# Altium PCB Final.PcbDoc
Units mil, origin at the board's own origin, x right, y up, seen from the top; angles counter-clockwise.
Board outline 2825 x 3675 mil, 4 copper layers (Top Layer, Int1 (GND), Int2 (PWR), Bottom Layer), stack 43.712 mil thick; 64 components, 44 nets, 192 pads, 1 vias.
Unrouted connection lines stored in the file: 20.
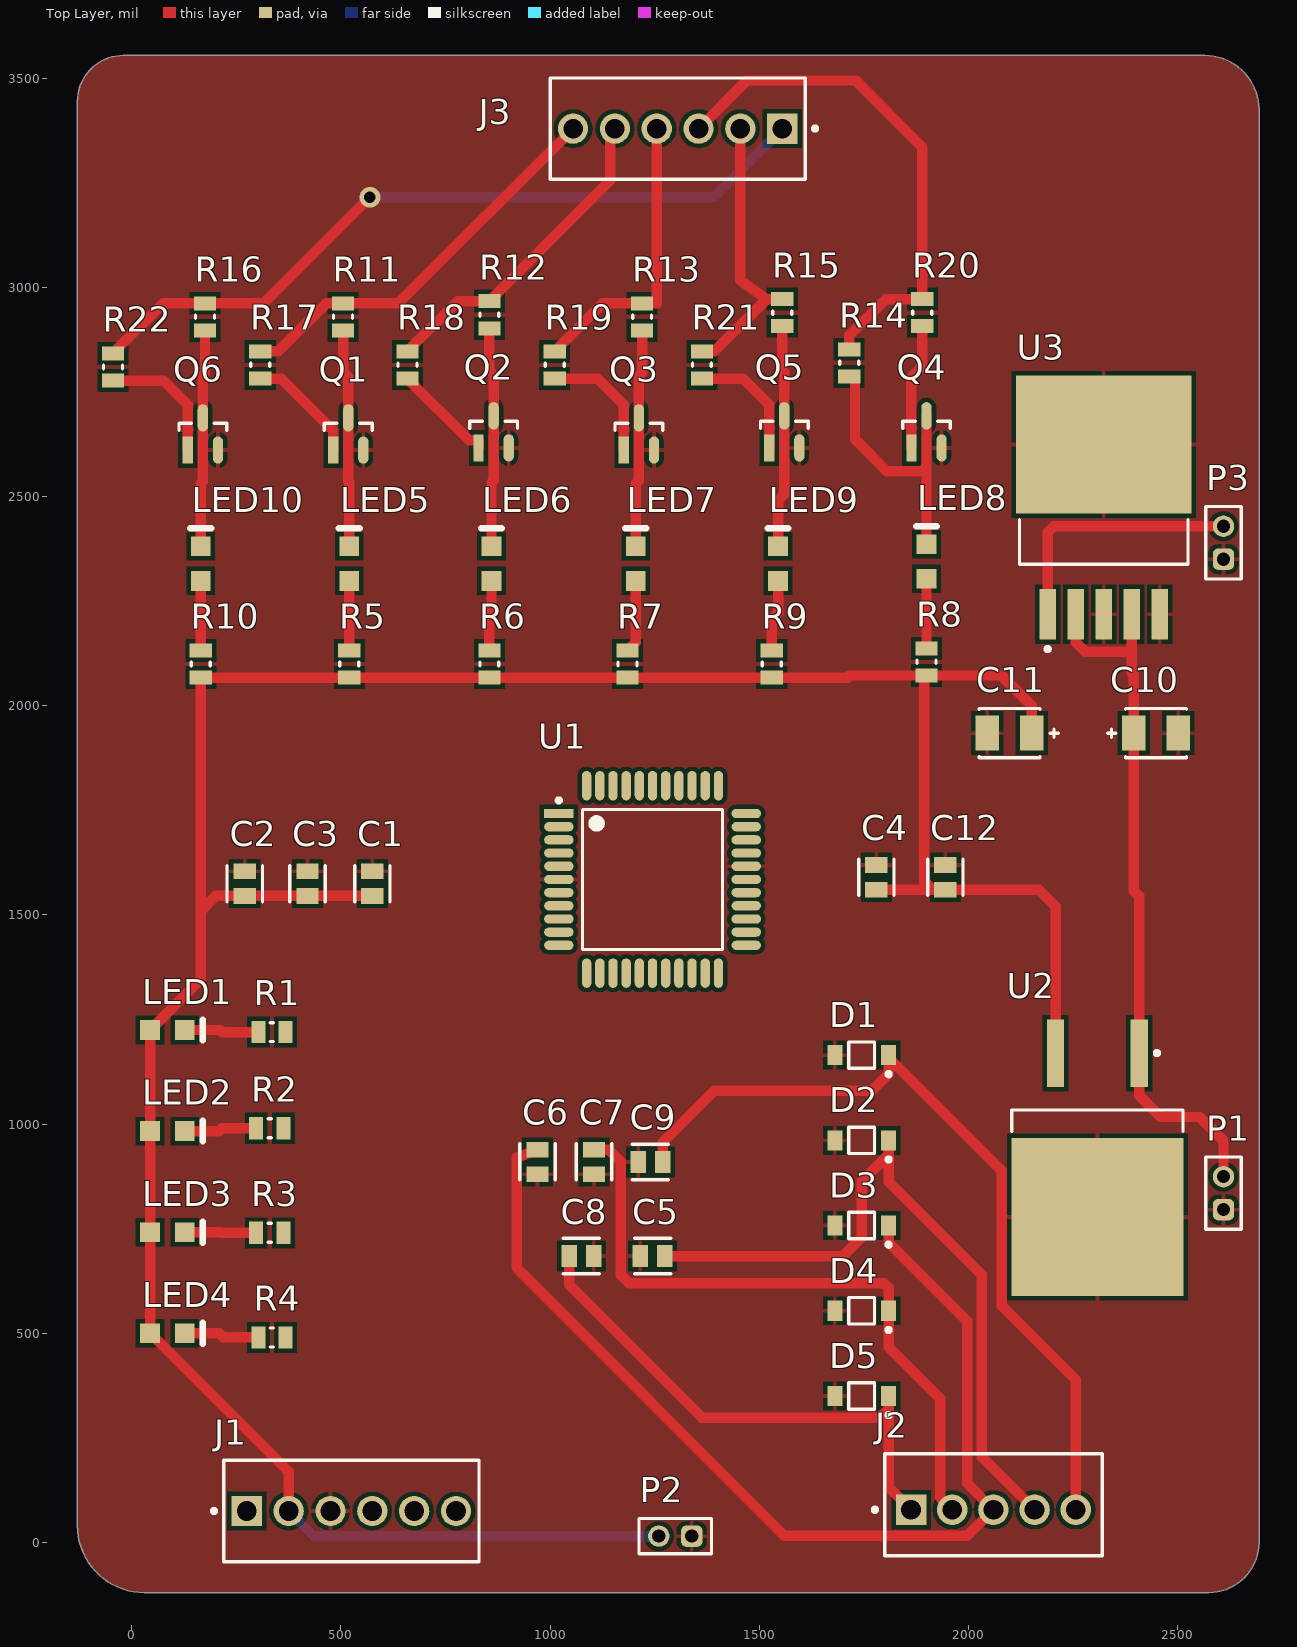
[diagram p0: Top Layer view]
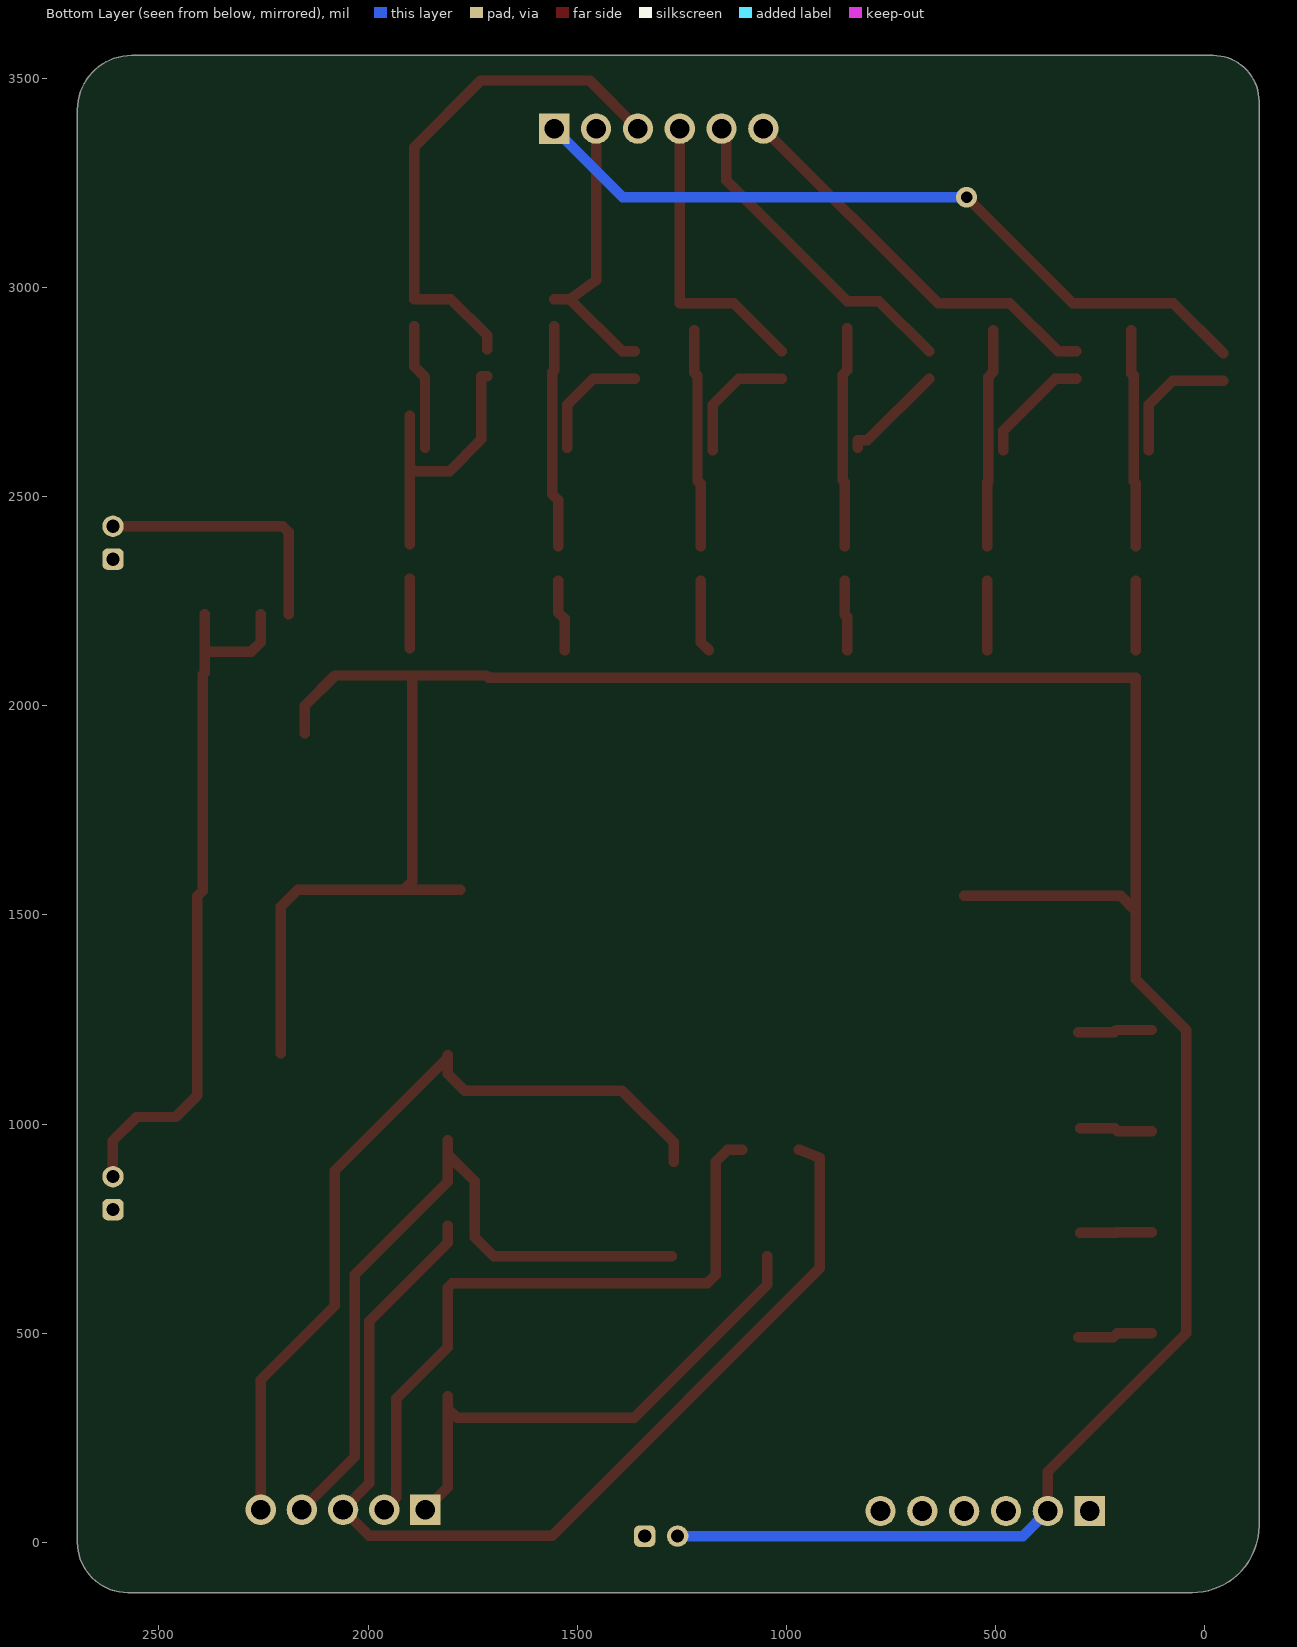
[diagram p1: Bottom Layer view, seen from below]
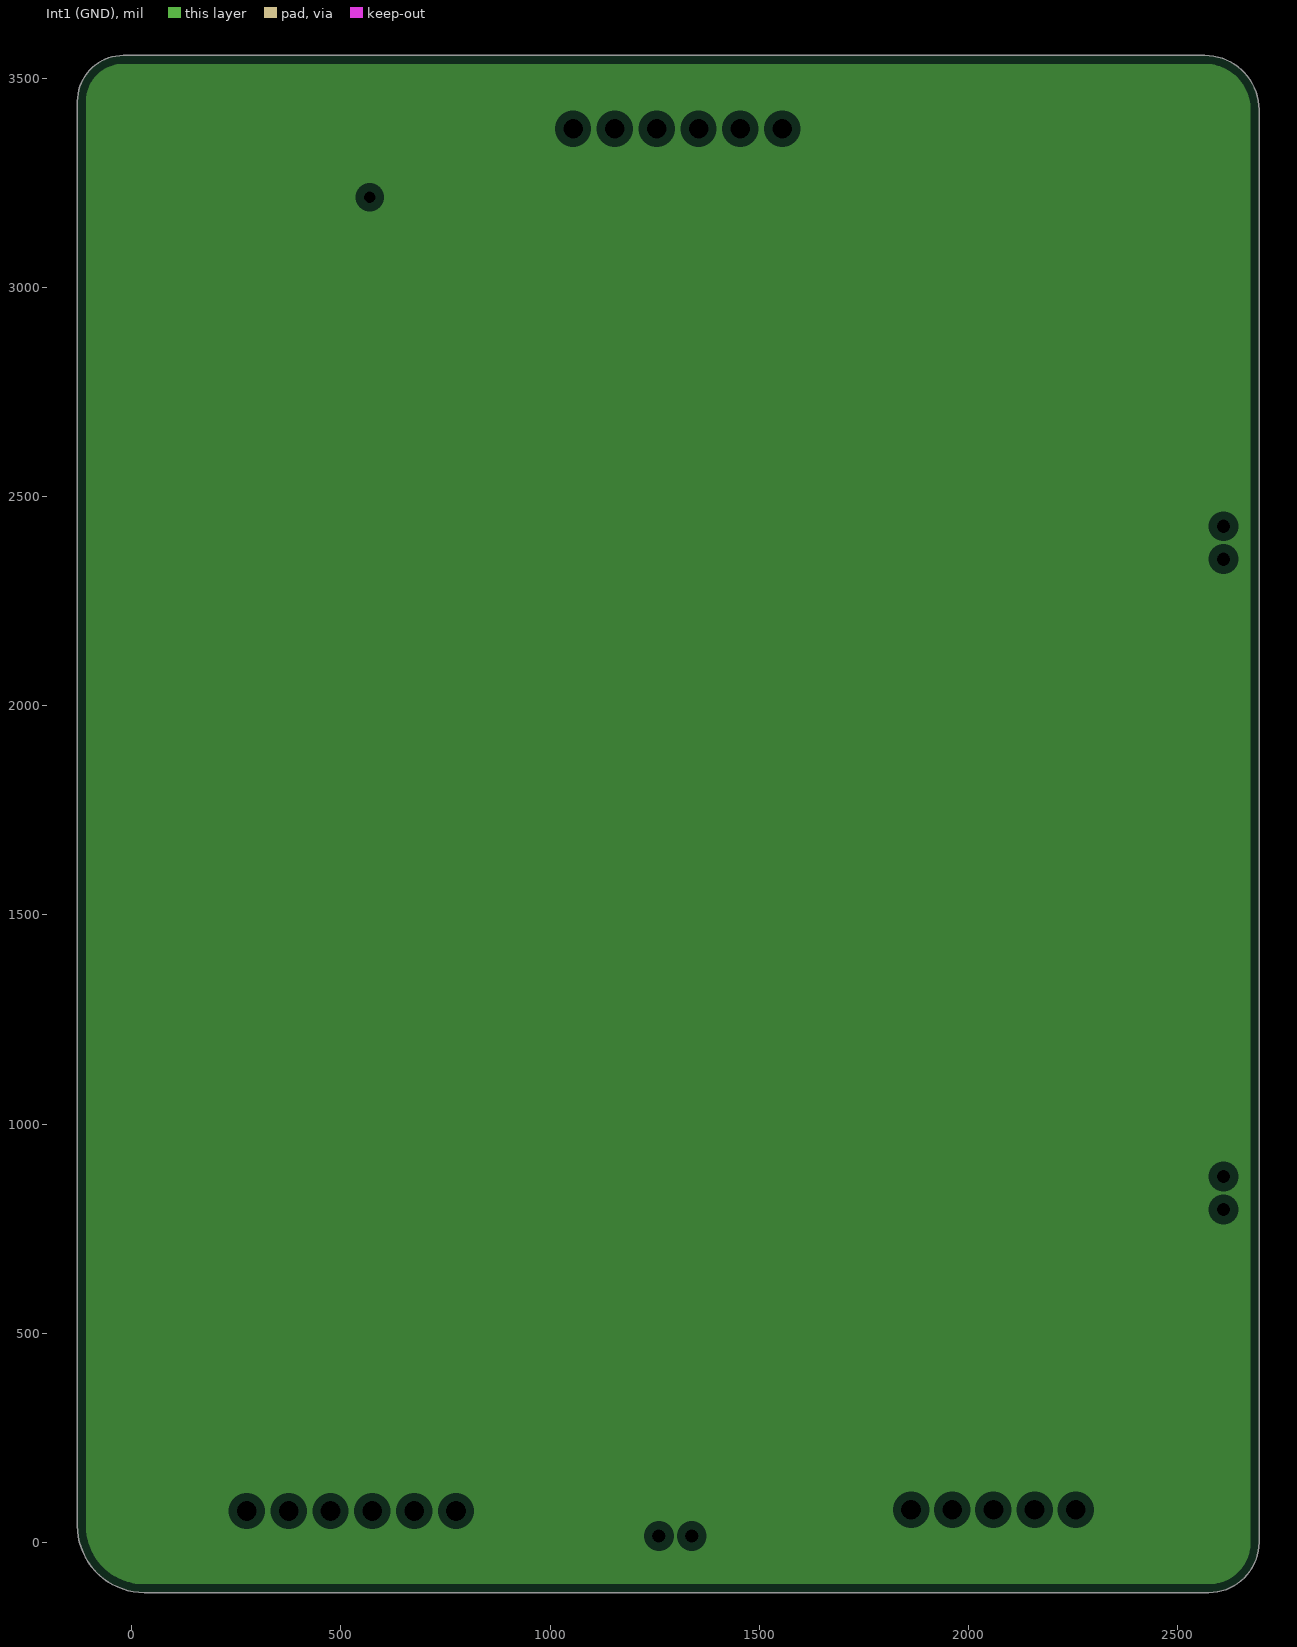
[diagram p2: Int1 (GND), clearances drawn from the general rule]
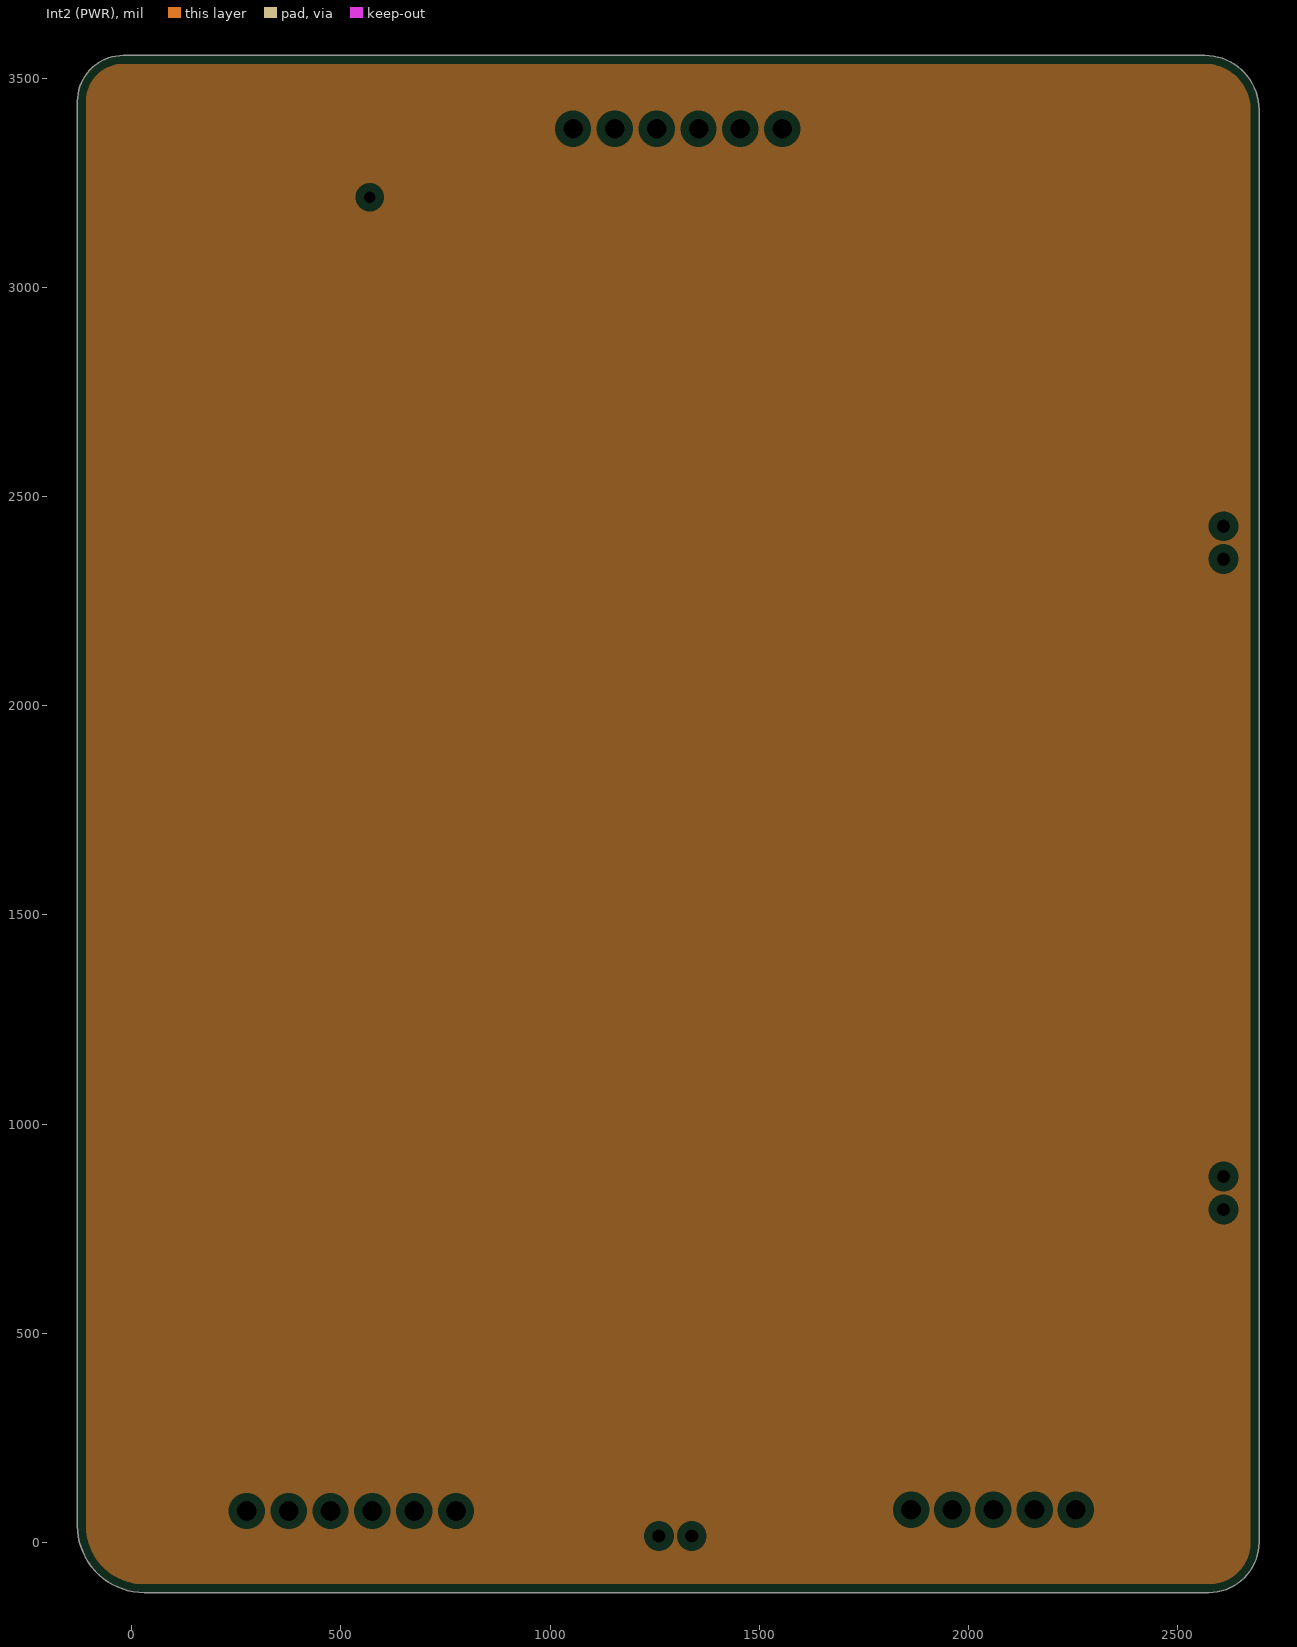
[diagram p3: Int2 (PWR), clearances drawn from the general rule]

## Layer stack, top to bottom
Top Solder: solder mask 1, SM-001, Dk 4
Top Layer: signal copper 1.378
Dielectric 1: prepreg 5.1, PP-017, Dk 4.3
Int1 (GND): plane copper 1.378, net GND
Dielectric 3: core 28, Core-039, Dk 4.8
Int2 (PWR): plane copper 1.378
Dielectric 5: prepreg 5.1, PP-017, Dk 4.3
Bottom Layer: signal copper 1.378
Bottom Solder: solder mask 1, SM-001, Dk 4

## Board outline
30,-120 2575,-120 ccw(c2575,0) 2695,0 2695,3425 ccw(c2565,3425) 2565,3555 -20,3555 ccw(c-20,3445) -130,3445 -130,40 ccw(c30,40)

## Design rules (kind name [scope] priority, off if disabled: settings)
Clearance [All] p1: gap=10 ignorepadtopadclearanceinfootprint=FALSE except(0: Arc-Hole Track-Hole SMDPad-Hole THPad-Hole Via-Hole Fill-Hole Poly-Hole Region-Hole Text-Hole)
PlaneClearance [All] p1: clearance=20
PlaneConnect [All] p1: planeconnectstyle=Relief reliefexpansion=20 reliefentries=4 reliefconductorwidth=10 reliefairgap=10
PolygonConnect [All] p1: connectstyle=Relief reliefconductorwidth=10 reliefentries=4 polygonreliefangle="90 Angle" airgapwidth=10
RoutingVias [All] p1: holewidth=28 width=50 viastyle="Through Hole" minholewidth=28 minwidth=50 maxholewidth=28 maxwidth=50
SolderMaskExpansion [All] p1: expansion=4 istentingtop=FALSE
Width [All] p1: maxlimit=50 minlimit=10 preferedwidth=25 minimp=50.000000 maximp=50.000000 favimp=50.000000
28 further rules are at their usual default settings.

## Components (designator, comment, footprint, x,y, rotation, side; value= is the part's Value field where it differs from the comment)
C1 "10n" FP-C0805C-DN-MFG 575,1575 r90 top value="0.22 μF"
C2 "10n" FP-C0805C-DN-MFG 270,1575 r90 top value="0.22 μF"
C3 "10n" FP-C0805C-DN-MFG 420,1575 r90 top value="0.22 μF"
C4 "10n" FP-C0805C-DN-MFG 1780,1590 r90 top value="0.22 μF"
C5 "100n" FP-C0805C-DN-MFG 1245,684.53 r180 top value="0.22 μF"
C6 "100n" FP-C0805C-DN-MFG 970,909.53 r270 top value="0.22 μF"
C7 "100n" FP-C0805C-DN-MFG 1105,909.53 r270 top value="0.22 μF"
C8 "10n" FP-C0805C-DN-MFG 1075,684.53 r0 top value="0.22 μF"
C9 "100n" FP-C0805C-DN-MFG 1240,909.53 r180 top value="0.22 μF"
C10 "220u / 63V" FP-T491B107K006AT-MFG 2448.59,1934.7 r180 top
C11 "10u / 63V" FP-T491B107K006AT-MFG 2098.59,1934.7 r0 top
C12 "10n" FP-C0805C-DN-MFG 1945,1590 r90 top value="0.22 μF"
D1 "5V1 / 1W" ONSC-SOD-123-2-425-04_V 1745,1165 r180 top
D2 "5V1 / 1W" ONSC-SOD-123-2-425-04_V 1745,961.25 r180 top
D3 "5V1 / 1W" ONSC-SOD-123-2-425-04_V 1745,757.5 r180 top
D4 "5V1 / 1W" ONSC-SOD-123-2-425-04_V 1745,553.75 r180 top
D5 "5V1 / 1W" ONSC-SOD-123-2-425-04_V 1745,350 r180 top
J1 "22-27-2061" FP-22-27-2061-MFG 525,75 r0 top
J2 "22-04-1051" FP-22-04-1051-MFG 2060,90 r180 top
J3 "22-27-2061" FP-22-27-2061-MFG 1305,3380 r180 top
LED1 "" AVAG-HSMX-C170_V 85,1225 r0 top
LED2 "" AVAG-HSMX-C170_V 85,983.33 r0 top
LED3 "" AVAG-HSMX-C170_V 85,741.67 r0 top
LED4 "" AVAG-HSMX-C170_V 85,500 r0 top
LED5 "" AVAG-HSMX-C170_V 520,2340 r90 top
LED6 "" AVAG-HSMX-C170_V 860,2340 r90 top
LED7 "" AVAG-HSMX-C170_V 1205,2340 r90 top
LED8 "" AVAG-HSMX-C170_V 1900,2345 r90 top
LED9 "" AVAG-HSMX-C170_V 1545,2340 r90 top
LED10 "" AVAG-HSMX-C170_V 165,2340 r90 top
P1 "62000211121" 62000211121 2610,835 r90 top
P2 "62000211121" 62000211121 1299.37,15 r180 top
P3 "62000211121" 62000211121 2610,2390 r90 top
Q1 "BS170FTA" FP-SOT23-IPC_A 517.5,2650 r90 top
Q2 "BS170FTA" FP-SOT23-IPC_A 865,2655 r90 top
Q3 "BS170FTA" FP-SOT23-IPC_A 1212.5,2650 r90 top
Q4 "BS170FTA" FP-SOT23-IPC_A 1900,2655 r90 top
Q5 "BS170FTA" FP-SOT23-IPC_A 1560,2655 r90 top
Q6 "BS170FTA" FP-SOT23-IPC_A 170,2650 r90 top
R1 "560E" RESC2013X50X30LL20T20 335,1220 r180 top
R2 "560E" RESC2013X50X30LL20T20 330,990 r180 top
R3 "560E" RESC2013X50X30LL20T20 330,740 r180 top
R4 "560E" RESC2013X50X30LL20T20 335,490 r180 top
R5 "560E" RESC2013X50X30LL20T20 520,2100 r270 top
R6 "560E" RESC2013X50X30LL20T20 855,2100 r270 top
R7 "560E" RESC2013X50X30LL20T20 1185,2100 r270 top
R8 "560E" RESC2013X50X30LL20T20 1900,2105 r270 top
R9 "560E" RESC2013X50X30LL20T20 1530,2100 r270 top
R10 "560E" RESC2013X50X30LL20T20 165,2100 r270 top
R11 "560E" RESC2013X50X30LL20T20 505,2930 r90 top
R12 "560E" RESC2013X50X30LL20T20 855,2935 r90 top
R13 "560E" RESC2013X50X30LL20T20 1220,2930 r90 top
R14 "560E" RESC2013X50X30LL20T20 1715,2820 r90 top
R15 "560E" RESC2013X50X30LL20T20 1555,2940 r90 top
R16 "560E" RESC2013X50X30LL20T20 175,2930 r90 top
R17 "560E" RESC2013X50X30LL20T20 307,2815 r90 top
R18 "560E" RESC2013X50X30LL20T20 659,2815 r90 top
R19 "560E" RESC2013X50X30LL20T20 1011,2815 r90 top
R20 "560E" RESC2013X50X30LL20T20 1890,2940 r90 top
R21 "560E" RESC2013X50X30LL20T20 1363,2815 r90 top
R22 "560E" RESC2013X50X30LL20T20 -45,2810 r90 top
U1 "PIC16F1787-I/PT" FP-C04-076-IPC_A 1245,1585 r0 top
U2 "L7805CD2T-TR" TO-263_M 2308.59,919.7 r270 top
U3 "LM2576D2T-005G" FP-936A-02-MFG 2323.59,2474.3 r0 top

## Footprints (in the part's own frame and the unit in brackets; to place one, negate y for a bottom-side part, rotate by r counter-clockwise, add the part's x,y. Pads: shape width x height; smd on the part's side, far side on the other; paste and mask are expansions set on the pad)
62000211121 [mm] "Pin Header, pitch 2.00 mm, THT, Vertical, single row, 2p"
  rrect50% 1.3x1.3 hole 0.8: 1(-1,0)
  round 1.3 hole 0.8: 2(1,0)
  silkscreen extent -2.2,-1.07 2.2,1.07, body extent -2,-1 2,1, height 6.05
AVAG-HSMX-C170_V [mm] "SMD, 2-Leads, Body 2x1.25mm, Height 0.8mm"
  rect 1.2x1.2 smd: 1(-1.05,0) 2(1.05,0)
  silkscreen extent 2.15,-0.62 2.15,0.62, body extent -1,-0.63 1,0.63, height 0.8
FP-22-04-1051-MFG [mm]
  rect 1.85x1.85 hole 1.2 paste-2539.97 mask+0: 1(5,0.3)
  round 1.85 hole 1.2 paste-2539.97 mask+0: 2(2.5,0.3) 3(0,0.3) 4(-2.5,0.3) 5(-5,0.3)
  silkscreen extent -6.6,-3.1 7.32,3.1, body extent -6.7,-3.2 6.7,3.2, height 0.25
FP-22-27-2061-MFG [mm]
  rect 1.84x1.84 hole 1.19 paste-2539.97 mask+0: 1(-6.35,0)
  round 1.84 hole 1.19 paste-2539.97 mask+0: 2(-3.81,0) 3(-1.27,0) 4(1.27,0) 5(3.81,0) 6(6.35,0)
  silkscreen extent -8.47,-3.07 7.75,3.08, body extent -7.85,-3.17 7.85,3.17, height 0.25
FP-936A-02-MFG [mm]
  rect 1.016x3.05 smd paste+0 mask+0: 1(-3.404,-6.485) 2(-1.702,-6.485) 3(0,-6.485) 4(1.702,-6.485) 5(3.404,-6.485)
  rect 10.66x8.38 smd paste+0 mask+0: 6(0,3.82)
  silkscreen extent -5.12,-8.72 5.12,-0.75, body extent -5.43,-8.11 5.43,8.11, height 0.25
FP-C04-076-IPC_A [mm]
  rect 1.788x0.566 smd paste+0 mask+0: 1(-5.691,4)
  rrect100% 1.788x0.566 smd paste+0 mask+0: 2(-5.691,3.2) 3(-5.691,2.4) 4(-5.691,1.6) 5(-5.691,0.8) 6(-5.691,0) 7(-5.691,-0.8) 8(-5.691,-1.6) 9(-5.691,-2.4) 10(-5.691,-3.2) 11(-5.691,-4) 23(5.691,-4) 24(5.691,-3.2) 25(5.691,-2.4) 26(5.691,-1.6) 27(5.691,-0.8) 28(5.691,0) 29(5.691,0.8) 30(5.691,1.6) 31(5.691,2.4) 32(5.691,3.2) 33(5.691,4)
  rrect100% 0.566x1.788 smd paste+0 mask+0: 12(-4,-5.691) 13(-3.2,-5.691) 14(-2.4,-5.691) 15(-1.6,-5.691) 16(-0.8,-5.691) 17(0,-5.691) 18(0.8,-5.691) 19(1.6,-5.691) 20(2.4,-5.691) 21(3.2,-5.691) 22(4,-5.691) 34(4,5.691) 35(3.2,5.691) 36(2.4,5.691) 37(1.6,5.691) 38(0.8,5.691) 39(0,5.691) 40(-0.8,5.691) 41(-1.6,5.691) 42(-2.4,5.691) 43(-3.2,5.691) 44(-4,5.691)
  silkscreen extent -5.82,-4.25 4.25,4.92, body extent -7.09,-7.09 7.09,7.09, height 0.25
FP-C0805C-DN-MFG [mm]
  rect 0.95x1.35 smd paste+0 mask+0: 1(-0.75,0) 2(0.75,0)
  silkscreen extent -1.1,-1.07 1.1,1.07, body extent -1.4,-0.85 1.4,0.85, height 0.25
FP-SOT23-IPC_A [mm]
  rect 1.659x0.627 smd paste+0 mask+0: 1(-0.977,0.915)
  rrect100% 1.659x0.627 smd paste+0 mask+0: 2(-0.977,-0.915) 3(0.977,0)
  silkscreen extent 0.23,-1.45 0.65,1.45, body extent -2.31,-1.95 2.31,1.95, height 0.25
FP-T491B107K006AT-MFG [mm]
  rect 1.42x2.13 smd paste+0 mask+0: 1(-1.35,0) 2(1.35,0)
  silkscreen extent -1.85,-1.5 2.95,1.5, body extent -2.18,-1.62 2.18,1.62, height 0.25
ONSC-SOD-123-2-425-04_V [mm] "SOD, 2-Leads, Body 2.69x1.6mm"
  rect 0.91x1.22 smd: 1(-1.635,0) 2(1.635,0)
  silkscreen extent -1.76,-0.8 0.78,1.28, body extent -1.35,-0.8 1.35,0.8, height 1.35
RESC2013X50X30LL20T20 [mm] "Chip Resistor, 2-Leads, Body 2.00x1.25mm, IPC High Density"
  rect 0.85x1.35 smd: 1(-0.825,0) 2(0.825,0)
  silkscreen extent -0.1,-0.58 0.1,0.58, body extent -1.1,-0.72 1.1,0.72, height 0.5
TO-263_M [mm] "D2-PAK, 4-Leads, Body 9.2x10.2mm, Pitch 2.54mm, Lead Span 15.4mm, IPC Low Density"
  rect 4.1x1.05 smd: 1(-6.35,2.54) 3(-6.35,-2.54)
  rect 9.6x10.45 smd: 4(3.6,0)
  silkscreen extent -6.47,-5.2 -1.6,5.2, body extent -2.9,-5.2 6.45,5.2, height 4.6

## Part data
C1 C2 C3 C4 C5 C6 C7 C8 C9 C12: library part CMP-1036-04552-2, "CAP CER 10nF 50V X7R 0805", Capacitance="0.22 μF", Manufacturer=KEMET, Manufacturer Part Number=C0805C224K5RACTU, Package=C0805C-DN, Temperature="-55°C to +125°C", Temperature Characteristic=X7R, Temperature Coefficient=30ppm/°C, Temperature Range High=+125°C, Temperature Range Low=-55°C, Tolerance=0.1, Voltage Rating="50 V", Automotive=No, Category=Cap, ComponentLink2Description=Datasheet, ComponentLink2URL=https://content.kemet.com/datasheets/KEM_C1003_C0G_SMD.pdf, Device Class L1="Passive Components", Device Class L2=Capacitors, Device Class L3="Ceramic Capacitors", Digikey Description="CAP CER 0.22UF 50V X7R 0805", Height=0.88mm, Ipc Land Pattern Name=CAPC200125X78, Lead Free=Yes, Material=Ceramic, Mouser Description="CAP CER 0.22UF 50V X7R 0805", Octopart=https://octopart.com/c0805c224k5ractu-kemet-144670, RoHS=TRUE
C10 C11: library part CMP-03017-000031-1, "CAP TANT 10UF 10% 63V 1411", Capacitance=100uF, Case Code (Imperial)=1411, Case Code (Metric)=3528, Dielectric Material=Tantalum, ESR (Equivalent Series Resistance)=3R, Leakage Current=6.3uA, Max Operating Temperature=125°C, Min Operating Temperature=-55°C, Package Quantity=1, Tolerance=10%, Voltage=6.3V, Voltage Rating (DC)=6V, Case/Package=1411, Depth=2.8mm, Dissipation Factor=15%, Failure Rate=0.001%, Features="General Purpose", Height=1.9mm, Height - Seated (Max)=0.083inch, Lead Free="Lead Free", Length=3.5mm, Life (Hours)=2000Hour, Mount="Surface Mount", Number of Pins=2, Packaging="Tape and Reel", Polarity=Polar, Radiation Hardening=No, REACH SVHC="No SVHC", RoHS Compliant=Yes, Termination=SMD/SMT, Voltage Rating=6.3V, Width=2.8mm
D1 D2 D3 D4 D5: library part CMP-1060-00606-1, "Zener Voltage Regulator, 500 mW, 2-Pin SOD-123, Pb-Free, Tape and Reel", Manufacturer="On Semiconductor", PartNumber=MMSZ4691T1G, ComponentLink1Description="Manufacturer URL", ComponentLink1URL=http://www.onsemi.com/, ComponentLink2Description=Datasheet, ComponentLink2URL=http://www.onsemi.com/pub_link/Collateral/MMSZ4678T1-D.PDF, ComponentLink3Description="Package Specification", ComponentLink3URL=http://www.onsemi.com/pub_link/Collateral/425-04.PDF, DatasheetVersion="Rev. 9", Mounting Technology="Surface Mount", P Max (W)=0.5, PackageDescription="2-Pin SOD, Body 1.6 x 2.69 mm", PackageReference=SOD-123-2-425-04, PackageVersion="Rev. G, 10/2009", Packing="Tape and Reel", RoHS=Pb-Free, VZ Typ (V)=6.2
J1 J3: library part CMP-04776-000309-1, "CONN HEADER VERT 6POS 2.54MM", Color=Natural, Contact Resistance=10mR, Current Rating=4A, Flammability Rating="UL94 V-0", Housing Color=White, Max Operating Temperature=75°C, Max Voltage Rating (AC)=250V, Min Operating Temperature=0°C, Package Quantity=10000, Connector Type="Male Pin", Contact Material=Brass, Contact Mating Length=0.295inch, Contact Plating=Tin, Contact Type="Male Pin", Depth=5.8mm, Fastening Type=Friction, Gender=Male, Hole Diameter=1.02mm, Housing Material=Nylon, Lead Pitch=2.54mm, Length=15.24mm, Material=Nylon, Max Current Rating=4A, Mount="Through Hole", Number of Contacts=6, Number of Positions=6, Number of Rows=1, Orientation=Straight, Packaging=Bulk, Pitch=2.54mm, Radiation Hardening=No, REACH SVHC="No SVHC", Series=KK, Termination=Solder, Voltage Rating=250V, Voltage Rating (AC)=250V, Working Voltage=250V
J2: library part CMP-00257-00247488-1, "22-04-1051 KK Mini-Latch Straight Male, PCB Header, Through Hole, 1 Rows, 5 Contacts, 2.5mm Pitch", Color=Natural, Contact Resistance=20mΩ, Current Rating=3A, Flammability Rating="UL94 V-0", Insulation Resistance=1GΩ, Manufacturer Lifecycle Status=ACTIVE, Max Operating Temperature=105°C, Max Voltage Rating (AC)=250V, Max Voltage Rating (DC)=250.25kV, Min Operating Temperature=-40°C, Connector Type="Male Pin", Contact Material=Brass, Contact Mating Length=7.493mm, Contact Plating=Tin, Country of Origin=TW, Depth=4.9mm, Fastening Type=Friction, Gender=Male, Glow Wire Compliant=Non-compliant, Halogen Free="Low Halogen", Housing Color=Natural, Housing Material=Nylon, Lead Free="Lead Free", Lead Pitch=2.5mm, Length=12mm, Lifecycle Status=Production, Material=Nylon, Mount="Through Hole", NexarPartId=247488, Number of Circuits=5, Number of Contacts=5, Number of Pins=5, Number of Positions=5, Number of Rows=1, Orientation=Vertical, Packaging=Bulk, Pitch=2.5mm, Plating=Tin, Radiation Hardening=No, REACH SVHC=Unknown, RoHS=Compliant, Schedule B=8536694040, Termination=Solder, Voltage Rating=250V, Voltage Rating (AC)=250V, Voltage Rating (DC)=250V
LED1 LED2 LED3 LED4 LED5 LED6 LED7 LED8 LED9 LED10: library part CMP-2000-05062-1, "Chip LED, Green, 2.2 V, -40 to 85 degC, 2-Pin SMD, Pb-Free, Tape and Reel", Forward Current If=20mA, Forward Voltage=2.2V, Forward Voltage VF Max=2.6V, LED Colour=Green, Manufacturer=Avago, Operating Temperature Max=85degC, Operating Temperature Min=-30degC, Operating Temperature Range=-30degCto+85degC, Opto Case Style=SMD, Package Description="2-Pin Surface Mount Device, Body 2 x 1.25 mm, Height 0.8 mm", Package Reference=HSMX-C170, Storage Temperature Min=-40degC, Bulb Size=1.25mmx1.4mm, Datasheet URL=https://datasheet.ciiva.com/29280/180495-da-01-en-chip-led-hsmg-c170-gelb-gruen-29280971.pdf, Datasheet Version=Oct-08, Dominant Wavelength=572nm, Dominant Wavelength Typ=572nm, External Depth=0.8mm, External Length / Height=2mm, External Width=1.25mm, Forward Current If Max=20mA, LED Mounting=SMD, LED Type=Standard, Lens Shape=Rectangular, Light Area Height=1mm, Luminous Intensity=15mcd, Luminous Intensity Min=4mcd, Luminous Intensity Typ=15mcd, Manufacturer URL=http://www.avagotech.com/, Mounting Type=SMD, MSL=MSL2A-4weeks, No. of Pins=2, Opto Mounting Orientation=Top, Packaging=CutTape, Peak Forward Current=20mA, Peak Wavelength=570nm, PIV Max=5V, Storage Temperature Max=85degC, SVHC=NoSVHC(16-Jun-2014), Viewing Angle=170deg, Voltage Vf Typ=2.2V, Wavelength Typ=570nm
P1 P2 P3: library part CMP-1502-00956-3, Contact Resistance=20mΩ, Current Rating=2A, Max Operating Temperature=105°C, Min Operating Temperature=-40°C, Operating Supply Voltage=200V, Contact Material=Gold, Gender=Male, Height=6.35mm, Lead Pitch=2mm, NexarPartId=61924778, Number of Contacts=2, Number of Pins=2, Number of Rows=1, Orientation=Vertical, RoHS=Non-Compliant, Voltage Rating=200V
Q1 Q2 Q3 Q4 Q5 Q6: library part CMP-12801-000064-2, "MOSFET N-CH 60V .15MA SOT23-3", Case/Package=SOT-23, Continuous Drain Current (ID)=150mA, Drain to Source Breakdown Voltage=60V, Drain to Source Resistance=5R, Gate to Source Voltage (Vgs)=20V, Input Capacitance=60pF, Max Operating Temperature=150°C, Max Power Dissipation=330mW, Min Operating Temperature=-55°C, Package Quantity=3000, Threshold Voltage=3V, Contact Plating=Tin, Current Rating=150mA, Drain to Source Voltage (Vdss)=60V, Dual Supply Voltage=60V, Element Configuration=Single, Height=1mm, Lead Free="Lead Free", Length=3.05mm, Mount="Surface Mount", Nominal Vgs=3V, Number of Channels=1, Number of Elements=1, Number of Pins=3, On-State Resistance=5R, Packaging="Tape and Reel", Power Dissipation=330mW, Rds On Max=5R, REACH SVHC="No SVHC", Termination=SMD/SMT, Turn-Off Delay Time=10ns, Turn-On Delay Time=10ns, Voltage Rating (DC)=60V, Weight=0.000282oz, Width=1.4mm
R1 R2 R3 R4 R5 R6 R7 R8 R9 R10 R11 R12 R13 R14 R15 R16 R17 R18 R19 R20 R21 R22: library part CMP-2001-04896-1, Manufacturer="Vishay Dale", Part Number=CRCW08050000Z0EA
U1: library part CMP-06276-000510-1, "IC MCU 8BIT 14KB FLASH 44TQFP", Case/Package=TQFP, Frequency=32MHz, Max Operating Temperature=85°C, Max Supply Voltage=5.5V, Min Operating Temperature=-40°C, Min Supply Voltage=2.3V, Nominal Supply Current=2.1mA, Package Quantity=160, Address Bus Width=8b, Core Architecture=PIC, Data Bus Width=8b, Height=1.05mm, Interface=I2C, Lead Free="Lead Free", Length=10mm, Max Frequency=32MHz, Memory Size=14KB, Memory Type=FLASH, Mount="Surface Mount", Number of ADC Channels=14, Number of I2C Channels=1, Number of I/Os=36, Number of Pins=44, Number of Programmable I/O=36, Number of PWM Channels=3, Number of SPI Channels=1, Number of Timers/Counters=3, Number of USB Channels=1, Packaging=Tray, Peripherals=PWM, RAM Size=1KB, Reach SVHC Compliant=Yes, RoHS Compliant=Yes, Series=PIC16, Supply Current=2.1mA, Width=10mm
U2: library part CMP-0244-00213-1, "Positive Voltage Regulator, 3-Pin D2PAK, Tape and Reel", ComponentLink1Description="Manufacturer URL", ComponentLink1URL=http://www.st.com, ComponentLink2Description=Datasheet, ComponentLink2URL=http://www.st.com/internet/com/TECHNICAL_RESOURCES/TECHNICAL_LITERATURE/DATASHEET/CD00000444.pdf, DatasheetVersion=16/11/2011, PackageDescription="3-Pin Transistor Outline Package 2.54 mm Pitch, 15.4 mm Lead Span (D2PAK)", PackageReference=TO-263, PackageVersion=2011
U3: library part CMP-07129-000010-1, "IC REG MULTI CONFG 5V 3A D2PAK-5", Manufacturer="ON Semiconductor", Max Junction Temp=+125°C, Max Supply Voltage=40V, Min Supply Voltage=7V, Nominal Supply Current=5mA, Output Current=3A, Output Voltage=5V, Package=936A-02, Switching Frequency=52kHz, Temperature="-40°C to +125°C", Temperature Range Low=-40°C, Automotive=No, Category=IC, ComponentLink2Description=Datasheet, ComponentLink2URL=https://www.onsemi.cn/PowerSolutions/document/LM2576-D.PDF, Device Class L1="Integrated Circuits (ICs)", Device Class L2="Power Management ICs", Device Class L3="Voltage Regulators - Switching", Digikey Description="IC REG MULTI CONFG 5V 3A D2PAK-5", Footprint Url=https://www.onsemi.com/pub/Collateral/936A-02.PDF, Height=4.826mm, Lead Free=Yes, Manufacturer Part Number=LM2576D2T-005G, Max Duty Cycle=98%, Mouser Description="Buck Regulator, Switching, 3.0 A, 15 V 3.0 A, 5.0 V, 52 kHz", Number of Outputs=1, Octopart=https://octopart.com/lm2576d2t-005g-on+semiconductor-725168, Output Type=Fixed, RoHS=TRUE, Standoff Height=0mm, Switching Topology=Buck, Temperature Range High=+125°C

## Via types
v1: diameter 50, hole 28, Top Layer to Bottom Layer, 1 vias

## Nets (pads, with @x,y where several pads share a name; then routed paths per layer and width w, separated by ;. In a path a pad name is that pad's centre, name@x,y a point inside that pad or via, vN(x,y) a via of type N, cw(c..) or ccw(c..) an arc to the next point about the centre after c; other vN are vias at no path point)
+5: C1.1 C2.1 C3.1 C4.1 C11.2 C12.1 J1.2 LED1.1 LED2.1 LED3.1 LED4.1 P2.2 R5.2 R6.2 R7.2 R8.2 R9.2 R10.2 U1.7 U1.28 U2.3 | length 6914.7
  Top Layer w25: J1.2 375,168.66 LED4.1 LED3.1 LED2.1 LED1.1 165,1346.34 165,1509.47 ; C1.1 C3.1 C2.1 201,1545.47 165,1509.47 ; C4.1 1914.53,1560.47 ; C11.2 2151.74,2000 2079.22,2072.52 R8.2 R8.2@1895,2072.52 ; U2.3 2208.59,1520 2168.12,1560.47 C12.1 1914.53,1560.47 ; 165,1509.47 R10.2 R5.2 R6.2 R7.2 R9.2 1712,2067.52 1717,2072.52 R8.2@1895,2072.52 ; R8.2@1895,2072.52 1895,1580 1914.53,1560.47
  Bottom Layer w25: J1.2 435,15 P2.2
+12: C10.2 P1.2 U2.1 U3.2 U3.4 | length 1704.7
  Top Layer w25: U3.2 2256.58,2152.42 2280,2129 2380,2129 2390.6,2139.6 ; U3.4 2390.6,2139.6 ; P1.2 2610,960 2553,1017 2460,1017 2408.59,1068.41 U2.1 2408.59,1545 2395.44,1558.15 C10.2 2395.44,2074 2390.6,2078.84 2390.6,2139.6
+48: P3.2 U3.1 | length 622.4
  Top Layer w25: U3.1 2189.58,2415 2203.95,2429.37 P3.2
"\M\C\L\R\ / VCC": J1.1 U1.18
DIR_L: J3.5 R12.2 R18.2 U1.38 | length 788.9
  Top Layer w25: R18.2 779,2967.48 R12.2 1144,3256.48 1144,3380 J3.5
DIR_R: J3.2 R15.2 R21.2 U1.39 | length 683.3
  Top Layer w25: R21.2 1392.48,2847.48 1517.48,2972.48 ; J3.2 1455,3017.48 1517.48,2972.48 ; R15.2 1517.48,2972.48
ENA_L: J3.4 R13.2 R19.2 U1.40 | length 709.2
  Top Layer w25: R19.2 1126,2962.48 R13.2 1255,2962.48 J3.4
ENA_R: J3.1 R16.2 R22.2 U1.41 | length 1822.6
  Top Layer w25: R22.2 75,2962.48 R16.2 315.48,2962.48 v1(569,3216)
  Bottom Layer w25: v1(569,3216) 1391,3216 J3.1
FWD: C7.1 D4.1 J2.2 U1.20 | length 1593.1
  Top Layer w25: C7.1 1140,939.06 1169,910.06 1169,640 1189,620 1798.37,620 1809.37,609 D4.1 1809.37,467 1932.5,343.87 1932.5,107.26 J2.2
FWD_LED: R1.1 U1.2
GND: C1.2 C2.2 C3.2 C4.2 C5.2 C6.2 C7.2 C8.2 C9.2 C10.1 C11.1 C12.2 D1.2 D2.2 D3.2 D4.2 D5.2 J1.3 P1.1 P2.1 P3.1 Q1.2 Q2.2 Q3.2 Q4.2 Q5.2 Q6.2 U1.6 U1.29 U2.4 U3.3 U3.5 U3.6
LEFT: C5.1 D2.1 J2.4 U1.22 | length 1742.3
  Top Layer w25: C5.1 1274.53,684 1700,684 1745,729 1745,863 1809.37,927.37 ; D2.1 1809.37,927.37 ; J2.4 2032,204.62 2032,640 1809.37,862.63 1809.37,927.37
LEFT_LED: R3.1 U1.4
NetLED1_2: LED1.2 R1.2 | length 178.3
  Top Layer w25: LED1.2 211,1225 216,1220 R1.2
NetLED2_2: LED2.2 R2.2 | length 173.9
  Top Layer w25: LED2.2 208,983.33 214.67,990 R2.2
NetLED3_2: LED3.2 R3.2 | length 171.9
  Top Layer w25: LED3.2 211,741.67 212.67,740 R3.2
NetLED4_2: LED4.2 R4.2 | length 180.3
  Top Layer w25: LED4.2 209,500 219,490 R4.2
NetLED5_1: LED5.1 R5.1 | length 166.2
  Top Layer w25: R5.1 LED5.1
NetLED5_2: LED5.2 Q1.3 R11.1 | length 522.4
  Top Layer w25: R11.1 505,2798.5 517.5,2786 Q1.3 517.5,2535.5 520,2533 LED5.2
NetLED6_1: LED6.1 R6.1 | length 168.3
  Top Layer w25: R6.1 855,2213 860,2218 LED6.1
NetLED6_2: LED6.2 Q2.3 R12.1 | length 527.4
  Top Layer w25: R12.1 855,2802 865,2792 Q2.3 865,2539 860,2534 LED6.2
NetLED7_1: LED7.1 R7.1 | length 174.5
  Top Layer w25: R7.1 1205,2152.48 LED7.1
NetLED7_2: LED7.2 Q3.3 R13.1 | length 522.4
  Top Layer w25: LED7.2 1205,2531 1212.5,2538.5 Q3.3 1212.5,2789 1220,2796.5 R13.1
NetLED8_1: LED8.1 R8.1 | length 166.2
  Top Layer w25: R8.1 LED8.1
NetLED8_2: LED8.2 Q4.3 R14.1 | length 678.3
  Top Layer w25: R14.1 1729,2787.52 1729,2637 1805,2561 1890,2561 1900,2571 ; LED8.2 1900,2571 ; Q4.3 1900,2571
NetLED9_1: LED9.1 R9.1 | length 172.4
  Top Layer w25: R9.1 1530,2208 1545,2223 LED9.1
NetLED9_2: LED9.2 Q5.3 R15.1 | length 534.5
  Top Layer w25: LED9.2 1545,2491 1560,2506 Q5.3 1560,2797 1555,2802 R15.1
NetLED10_1: LED10.1 R10.1 | length 166.2
  Top Layer w25: R10.1 LED10.1
NetLED10_2: LED10.2 Q6.3 R16.1 | length 520.3
  Top Layer w25: LED10.2 165,2532 170,2537 Q6.3 170,2790 175,2795 R16.1
NetQ1_1: Q1.1 R17.1 | length 272.5
  Top Layer w25: R17.1 357,2782.52 481.48,2658.04 Q1.1
NetQ2_1: Q2.1 R18.1 | length 249.5
  Top Layer w25: R18.1 806.52,2635 828.98,2635 Q2.1
NetQ3_1: Q3.1 R19.1 | length 299.8
  Top Layer w25: R19.1 1113.96,2782.52 1176.48,2720 Q3.1
NetQ4_1: Q4.1 R20.1 | length 301.8
  Top Layer w25: Q4.1 1863.98,2785.98 1890,2812 R20.1
NetQ5_1: Q5.1 R21.1 | length 290.3
  Top Layer w25: R21.1 1461.46,2782.52 1523.98,2720 Q5.1
NetQ6_1: Q6.1 R22.1 | length 311.3
  Top Layer w25: R22.1 76.46,2777.52 133.98,2720 Q6.1
PGC(ICSPCLK): J1.5 U1.16
PGD(ICSPDATA): J1.4 U1.17
POTSPEED: C8.1 D5.1 J2.1 U1.19 | length 1267.3
  Top Layer w25: C8.1 1045.47,616 1363.47,298 1787.37,298 1809.37,320 ; D5.1 1809.37,320 ; J2.1 1809.37,131.97 1809.37,320
REV: C6.1 D3.1 J2.3 U1.21 | length 2530.9
  Top Layer w25: C6.1 920,919.06 920,656 1560,16 1997.81,16 J2.3 1997,141.19 1997,528.37 1809.37,716 D3.1
REV_LED: R2.1 U1.3
RIGHT: C9.1 D1.1 J2.5 U1.23 | length 1965.7
  Top Layer w25: C9.1 1269.53,956.53 1393,1080 1769.37,1080 1809.37,1120 D1.1@1809.37,1159 ; D1.1 D1.1@1809.37,1159 ; J2.5 2256.85,389.15 2080,566 2080,888.37 D1.1@1809.37,1159
RIGHT_LED: R4.1 U1.5
STEP_L: J3.6 R11.2 R17.2 U1.27 | length 968.6
  Top Layer w25: R17.2 350.48,2847.48 465.48,2962.48 R11.2 637.48,2962.48 J3.6
STEP_R: J3.3 R14.2 R20.2 U1.44 | length 1256.1
  Top Layer w25: J3.3 1470,3495 1731,3495 1890,3336 R20.2 1802,2972.48 1715,2885.48 R14.2
pads on no net: J1.6 U1.1 U1.8 U1.9 U1.10 U1.11 U1.12 U1.13 U1.14 U1.15 U1.24 U1.25 U1.26 U1.30 U1.31 U1.32 U1.33 U1.34 U1.35 U1.36 U1.37 U1.42 U1.43

## Polygon pours and split planes (outlines as drawn)
GND on Top Layer "GND_L01_P000" (solid, pour order 0): 30,-120 2575,-120 ccw(c2575,0) 2695,0 2695,3425 ccw(c2565,3425) 2565,3555 -20,3555 ccw(c-20,3445) -130,3445 -130,40 ccw(c30,40)
no net on Int1 (GND) (split plane): 2573.63,3534.65 2582.21,3533.63 2590.68,3531.95 2598.99,3529.6 2607.09,3526.61 2614.93,3523 2622.47,3518.78 2629.65,3513.98 2636.43,3508.63 2642.77,3502.77 2648.63,3496.43 2653.98,3489.65 2658.78,3482.47 2663,3474.93 2666.61,3467.09 2669.6,3458.99 2671.95,3450.68 2673.63,3442.21 2674.65,3433.63 2674.96,3425.59 2674.9,3425 2674.9,0 2674.97,-0.65 2674.61,-8.72 2673.48,-17.36 2671.59,-25.88 2668.96,-34.2 2665.63,-42.26 2661.6,-50 2656.91,-57.35 2651.6,-64.28 2645.71,-70.71 2639.28,-76.6 2632.35,-81.91 2625,-86.6 2617.26,-90.63 2609.2,-93.96 2600.88,-96.59 2592.36,-98.48 2583.72,-99.61 2575.65,-99.97 2575,-99.9 30,-99.9 29.36,-99.97 20.01,-99.63 10.08,-98.56 0.24,-96.79 -9.44,-94.32 -18.92,-91.16 -28.15,-87.34 -37.09,-82.87 -45.68,-77.77 -53.89,-72.07 -61.67,-65.8 -68.99,-58.99 -75.8,-51.67 -82.07,-43.89 -87.77,-35.68 -92.87,-27.09 -97.34,-18.15 -101.16,-8.92 -104.32,0.56 -106.79,10.24 -108.56,20.08 -109.63,30.01 -109.97,39.36 -109.9,40 -109.9,3445 -109.96,3445.58 -109.64,3452.84 -108.62,3460.63 -106.92,3468.29 -104.56,3475.78 -101.55,3483.03 -97.93,3489.99 -93.71,3496.61 -88.93,3502.84 -83.63,3508.63 -77.84,3513.93 -71.61,3518.71 -64.99,3522.93 -58.03,3526.55 -50.78,3529.56 -43.29,3531.92 -35.63,3533.62 -27.84,3534.64 -20.58,3534.96 -20,3534.9 2565,3534.9 2565.59,3534.96
no net on Int2 (PWR) (split plane): 2573.63,3534.65 2582.21,3533.63 2590.68,3531.95 2598.99,3529.6 2607.09,3526.61 2614.93,3523 2622.47,3518.78 2629.65,3513.98 2636.43,3508.63 2642.77,3502.77 2648.63,3496.43 2653.98,3489.65 2658.78,3482.47 2663,3474.93 2666.61,3467.09 2669.6,3458.99 2671.95,3450.68 2673.63,3442.21 2674.65,3433.63 2674.96,3425.59 2674.9,3425 2674.9,0 2674.97,-0.65 2674.61,-8.72 2673.48,-17.36 2671.59,-25.88 2668.96,-34.2 2665.63,-42.26 2661.6,-50 2656.91,-57.35 2651.6,-64.28 2645.71,-70.71 2639.28,-76.6 2632.35,-81.91 2625,-86.6 2617.26,-90.63 2609.2,-93.96 2600.88,-96.59 2592.36,-98.48 2583.72,-99.61 2575.65,-99.97 2575,-99.9 30,-99.9 29.36,-99.97 20.01,-99.63 10.08,-98.56 0.24,-96.79 -9.44,-94.32 -18.92,-91.16 -28.15,-87.34 -37.09,-82.87 -45.68,-77.77 -53.89,-72.07 -61.67,-65.8 -68.99,-58.99 -75.8,-51.67 -82.07,-43.89 -87.77,-35.68 -92.87,-27.09 -97.34,-18.15 -101.16,-8.92 -104.32,0.56 -106.79,10.24 -108.56,20.08 -109.63,30.01 -109.97,39.36 -109.9,40 -109.9,3445 -109.96,3445.58 -109.64,3452.84 -108.62,3460.63 -106.92,3468.29 -104.56,3475.78 -101.55,3483.03 -97.93,3489.99 -93.71,3496.61 -88.93,3502.84 -83.63,3508.63 -77.84,3513.93 -71.61,3518.71 -64.99,3522.93 -58.03,3526.55 -50.78,3529.56 -43.29,3531.92 -35.63,3533.62 -27.84,3534.64 -20.58,3534.96 -20,3534.9 2565,3534.9 2565.59,3534.96